# Altium PCB PLC_Relay.PcbDoc
Units mil, origin at the board's own origin, x right, y up, seen from the top; angles counter-clockwise.
Board outline 5910 x 3111 mil, 2 copper layers (Top Layer, Bottom Layer); 70 components, 87 nets, 279 pads, 30 vias.
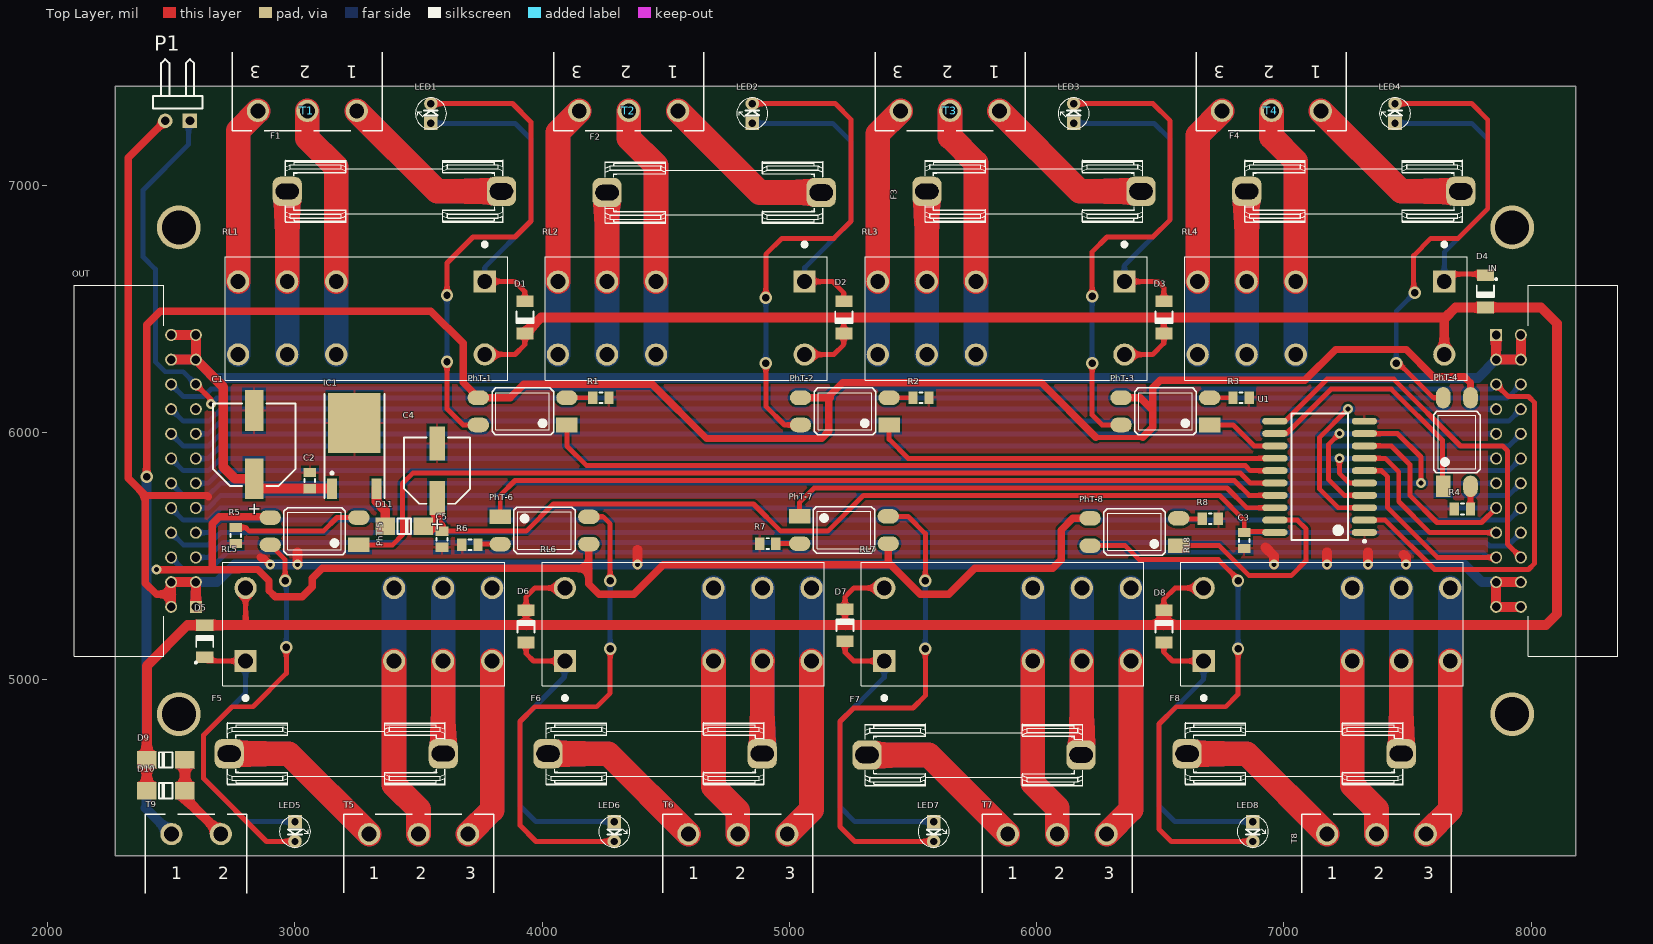
[diagram p0: Top Layer view]
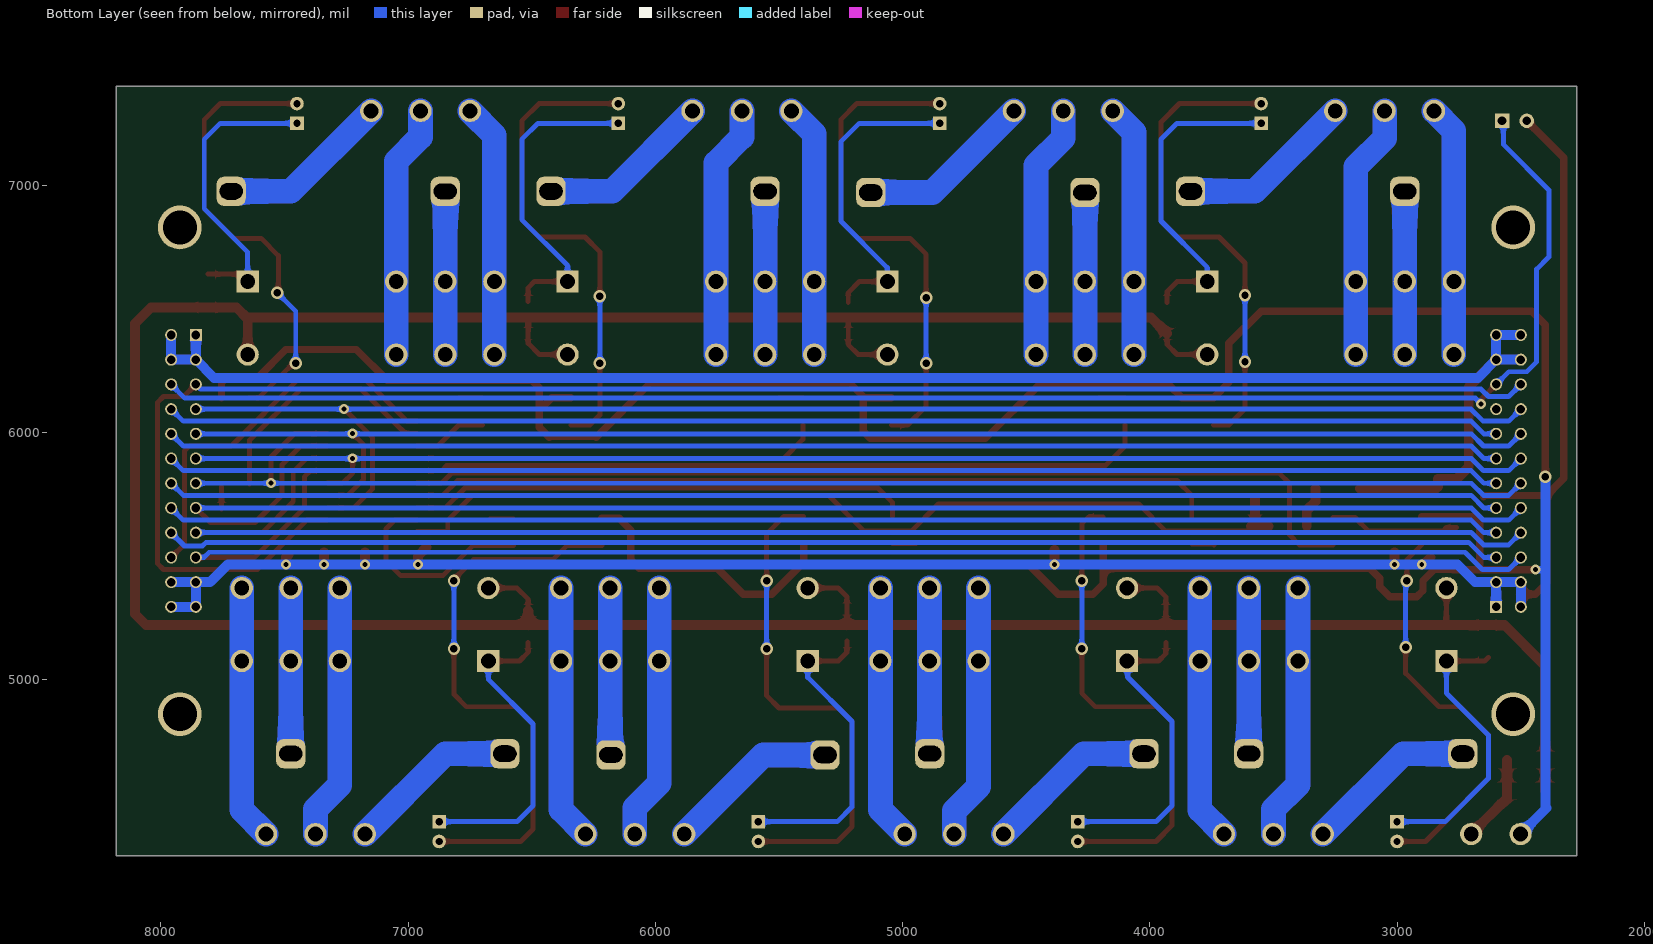
[diagram p1: Bottom Layer view, seen from below]
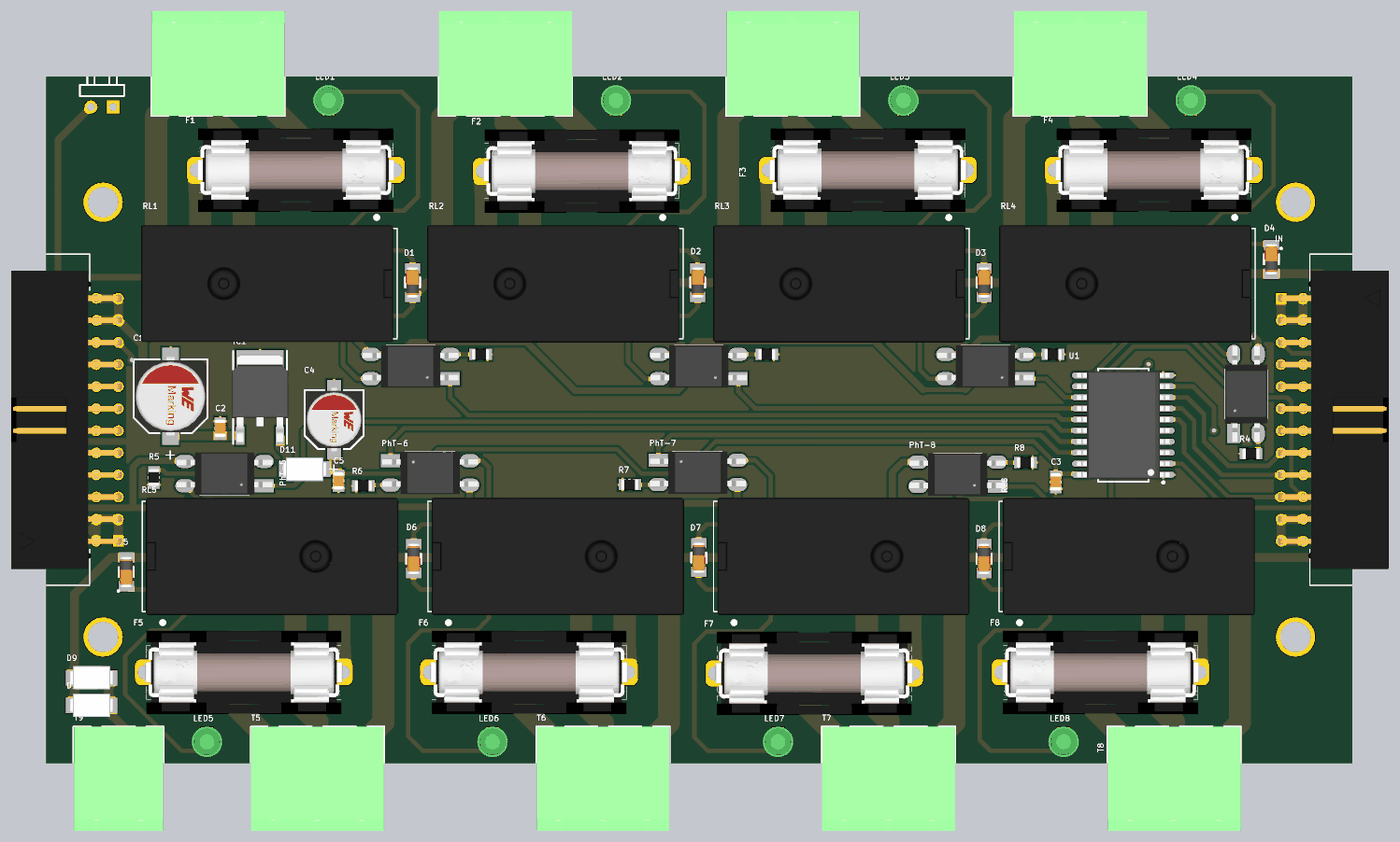
[diagram p2: 3D render of the assembled board from above, using the file's embedded part models]

## Layer stack, top to bottom
Top Solder: solder mask 0.4, Solder Resist, Dk 3.5
Top Layer: signal copper 1.4
Dielectric 1: dielectric 12.6, FR-4, Dk 4.8
Bottom Layer: signal copper 1.4
Bottom Solder: solder mask 0.4, Solder Resist, Dk 3.5

## Board outline
2272,4288 2272,7399 8182,7399 8182,4288

## Design rules (kind name [scope] priority, off if disabled: settings)
Clearance [All] p1: gap=10 ignorepadtopadclearanceinfootprint=FALSE except(0: Arc-Hole Track-Hole SMDPad-Hole THPad-Hole Via-Hole Fill-Hole Poly-Hole Region-Hole Text-Hole)
Height [All] p1: minheight=0 maxheight=2000 prefheight=500
PolygonConnect [All] p1: connectstyle=Relief reliefconductorwidth=10 reliefentries=4 polygonreliefangle="90 Angle" airgapwidth=10
RoutingVias [All] p1: holewidth=28 width=50 viastyle="Through Hole" minholewidth=20 minwidth=40 maxholewidth=28 maxwidth=50
SolderMaskExpansion [All] p1: expansion=4 istentingtop=FALSE
Width [All] p1: maxlimit=100 minlimit=10 preferedwidth=40
29 further rules are at their usual default settings.

## Components (designator, comment, footprint, x,y, rotation, side; value= is the part's Value field where it differs from the comment)
C1 "100uF,50V" WCAP-AS5H_8x10.5 2835,5950 r270 top
C2 "100nF" SMD_CAP_0805 3060,5837.09 r270 top
C3 "100nF" SMD_CAP_0805 6840,5530.04 r90 top
C4 "220uF,16V" WCAP-AS5H_6.3x7.7 3575,5845 r270 top
C5 "100nF" SMD_CAP_0805 3595,5535.04 r90 top
D1 "1N4148" LL4148 3930,6465 r270 top
D2 "1N4148" LL4148 5220,6465 r270 top
D3 "1N4148" LL4148 6515,6465 r270 top
D4 "1N4148" LL4148 7815,6570 r270 top
D5 "1N4148" LL4148 2635,5155 r90 top
D6 "1N4148" LL4148 3935,5215 r90 top
D7 "1N4148" LL4148 5225,5220 r90 top
D8 "1N4148" LL4148 6515,5215 r90 top
D9 "1n5822" "Diode 1N4007 SMD" 2555,4675 r180 top
D10 "1n5822" "Diode 1N4007 SMD" 2555,4550 r180 top
D11 "1n5822" "Diode 1N4007 SMD" 3365,5620 r0 top
F1 "F=1.0 A" Fuse_5x20 3401.93,6975 r180 top
F2 "F=1.0 A" Fuse_5x20 4695.64,6970 r180 top
F3 "F=1.0 A" Fuse_5x20 5989.36,6975 r180 top
F4 "F=1.0 A" Fuse_5x20 7283.07,6975 r180 top
F5 "F=1.0 A" Fuse_5x20 3166.93,4700 r0 top
F6 "F=1.0 A" Fuse_5x20 4456.93,4700 r0 top
F7 "F=1.0 A" Fuse_5x20 5746.93,4695 r0 top
F8 "F=1.0 A" Fuse_5x20 7041.93,4700 r0 top
IC1 "L78M05" TO-252 3240,5905 r0 top
IN "2-1761605-8" TE_2-1761605-8 7859,6394 r270 top locked
LED1 "Red" LED-3mm 3550,7290 r90 top
LED2 "Red" LED-3mm 4850,7290 r90 top
LED3 "Red" LED-3mm 6150,7290 r90 top
LED4 "Red" LED-3mm 7450,7290 r90 top
LED5 "Red" LED-3mm 3000,4385 r270 top
LED6 "Red" LED-3mm 4291.67,4385 r270 top
LED7 "Red" LED-3mm 5583.33,4385 r270 top
LED8 "Red" LED-3mm 6875,4385 r270 top
OUT "2-1761605-8" TE_2-1761605-8 2599,5294 r90 top locked
P1 "Header 2H" HDR1X2H 2575,7260 r180 top
PhT-1 "TLP521-1" PCBComponent_1 3945.39,6107.99 r180 top
PhT-2 "TLP521-1" PCBComponent_1 5248.66,6107.99 r180 top
PhT-3 "TLP521-1" PCBComponent_1 6545.4,6107.99 r180 top
PhT-4 "TLP521-1" PCBComponent_1 7723.23,5936.34 r90 top
PhT-5 "TLP521-1" PCBComponent_1 3103.66,5623.23 r180 top
PhT-6 "TLP521-1" PCBComponent_1 3985,5580 r0 top
PhT-7 "TLP521-1" PCBComponent_1 5196.34,5582.01 r0 top
PhT-8 "TLP521-1" PCBComponent_1 6420,5620 r180 top
R1 "270" "RES 0805 (2012X06L)" 4269.96,6140 r180 top
R2 "270" "RES 0805 (2012X06L)" 5564.96,6140 r180 top
R3 "270" "RES 0805 (2012X06L)" 6859.96,6140 r180 top
R4 "270" "RES 0805 (2012X06L)" 7690,5690 r0 top
R5 "270" "RES 0805 (2012X06L)" 2760,5550.04 r90 top
R6 "270" "RES 0805 (2012X06L)" 3675.04,5545 r0 top
R7 "270" "RES 0805 (2012X06L)" 4880.04,5550 r0 top
R8 "270" "RES 0805 (2012X06L)" 6734.96,5650 r180 top
RL1 "MPJ2-S-124-C" RELAY_RT424024 3767.64,6610.28 r270 top
RL2 "MPJ2-S-124-C" RELAY_RT424024 5061.5,6610 r270 top
RL3 "MPJ2-S-124-C" RELAY_RT424024 6355.35,6610 r270 top
RL4 "MPJ2-S-124-C" RELAY_RT424024 7649.21,6610 r270 top
RL5 "MPJ2-S-124-C" RELAY_RT424024 2800,5075 r90 top
RL6 "MPJ2-S-124-C" RELAY_RT424024 4091.93,5075 r90 top
RL7 "MPJ2-S-124-C" RELAY_RT424024 5383.86,5075 r90 top
RL8 "MPJ2-S-124-C" RELAY_RT424024 6675.79,5075 r90 top
T1 "PHOENIX" "MSTB 2,5/3-G-5,08" 3050,7300 r180 top
T2 "PHOENIX" "MSTB 2,5/3-G-5,08" 4350,7300 r180 top
T3 "PHOENIX" "MSTB 2,5/3-G-5,08" 5650,7300 r180 top
T4 "PHOENIX" "MSTB 2,5/3-G-5,08" 6950,7300 r180 top
T5 "PHOENIX" "MSTB 2,5/3-G-5,08" 3500,4375 r0 top
T6 "PHOENIX" "MSTB 2,5/3-G-5,08" 4791.67,4375 r0 top
T7 "PHOENIX" "MSTB 2,5/3-G-5,08" 6083.33,4375 r0 top
T8 "PHOENIX" "MSTB 2,5/3-G-5,08" 7375,4375 r0 top
T9 "PHOENIX" "MSTB 2,5/2-G-5,08" 2600,4375 r0 top
U1 "74573" SO20_M 7145,5820 r180 top

## Footprints (in the part's own frame and the unit in brackets; to place one, negate y for a bottom-side part, rotate by r counter-clockwise, add the part's x,y. Pads: shape width x height; smd on the part's side, far side on the other; paste and mask are expansions set on the pad)
"Diode 1N4007 SMD" [mm] "DO-214AC 1N4001-4007"
  rect 2x1.8 smd: 1(0,0) 2(3.92,0)
  silkscreen extent 1.27,-0.81 2.67,0.83, body extent -0.54,-1.36 4.46,1.34, height 2.16
Fuse_5x20 [mm]
  rrect50% 3x3 hole 1.6 slot 2.4 at 0 deg: 1(11,0)
  rrect50% 3x3 hole 1.7 slot 2.4 at 0 deg: 2(-11,0)
  silkscreen extent -11.19,-3.18 11.19,3.18, body extent -11.35,-4.8 11.35,4.8, height 12
HDR1X2H [mm] "Connector; Header; 2 Position; Right Angle"
  rect 1.5x1.5 hole 0.9: 1(0,0)
  round 1.5 hole 0.9: 2(2.54,0)
  silkscreen extent -1.27,-6.35 3.81,-1.27
LED-3mm [mil]
  rect 55x55 hole 30: 1(-40,0)
  round 55 hole 30: 2(40,0)
  silkscreen extent -63,-63 63,63, body extent -69,-69 69,69, height 154
LL4148 [mm] "MELF Diode, 2-Leads, Body 3.5x1.4mm, IPC Medium Density"
  rect 1.2x1.75 smd: 1(-1.65,0) 2(1.65,0)
  silkscreen extent -0.61,-0.87 0.57,0.88, body extent -1.78,-0.75 1.72,0.75, height 1.55
"MSTB 2,5/2-G-5,08" [mil] "Header, Nominal current: 12 A Rated voltage (III/2): 320 V Number of positions: 2 Pitch: 5.08 mm Color: green Contact surface: Tin Assembly: Soldering DESIGNER:ABBAS BASEREH"
  round 90 hole 60: 1(-100,0) 2(100,0)
  silkscreen extent -205,-240 205,80, body extent -199,-394 201,79, height 340
"MSTB 2,5/3-G-5,08" [mil] "Header, Nominal current: 12 A Rated voltage (III/2): 320 V Number of positions: 3 Pitch: 5.08 mm Color: green Contact surface: Tin Assembly: Soldering  DESIGNER:ABBAS BASEREH"
  round 90 hole 60: 1(-200,0) 2(0,0) 3(200,0)
  silkscreen extent -303,-238 303,80, body extent -300,-394 300,79, height 340
PCBComponent_1 [mm]
  rect 2.2x1.5 smd: 1(-3.927,1.987)
  oval 2.2x1.5 smd: 2(-3.927,-0.813) 3(5.173,-0.813) 4(5.173,1.987)
  silkscreen extent -2.55,-1.81 3.77,2.99, body extent -4.9,-1.85 6.15,3.03, height 4.6
RELAY_RT424024 [mil]
  round 90 hole 60: 11(0,-799.21) 12(0,-600.79) 14(0,-997.64) 21(295.28,-799.21) 22(295.28,-600.79) 24(295.28,-997.64) A2(295.28,0)
  rect 90x90 hole 60: A1(0,0)
  silkscreen extent -158,-1049 400,93, body extent -116,-1066 416,76, height 1004
"RES 0805 (2012X06L)" [mm] "Chip Resistor, 2-Leads, Body 2.0x1.3mm, IPC High Density _ (0.100 W)"
  rect 0.95x1.3 smd: 1(0,0) 2(1.65,0)
  silkscreen extent 0.67,-0.55 0.97,0.55, body extent -0.19,-0.63 1.84,0.64, height 0.6
SMD_CAP_0805 [mm]
  rect 0.95x1.3 smd: 1(0,0) 2(1.65,0)
  silkscreen extent 0.67,-0.55 0.97,0.55, body extent -0.19,-0.63 1.84,0.63, height 0.65
SO20_M [mm] "SOIC, 20-Leads, Body 12.8x7.5mm, Pitch 1.27mm, IPC Low Density"
  oval 2.6x0.7 smd: 1(-4.6,5.715) 2(-4.6,4.445) 3(-4.6,3.175) 4(-4.6,1.905) 5(-4.6,0.635) 6(-4.6,-0.635) 7(-4.6,-1.905) 8(-4.6,-3.175) 9(-4.6,-4.445) 10(-4.6,-5.715) 11(4.6,-5.715) 12(4.6,-4.445) 13(4.6,-3.175) 14(4.6,-1.905) 15(4.6,-0.635) 16(4.6,0.635) 17(4.6,1.905) 18(4.6,3.175) 19(4.6,4.445) 20(4.6,5.715)
  silkscreen extent -4.72,-6.5 2.9,6.74, body extent -5.32,-6.22 5.32,6.22, height 1.7
TE_2-1761605-8 [mm]
  rect 1.24x1.24 hole 0.89: 1(0,0)
  round 1.24 hole 0.89: 2(0,2.54) 3(2.54,0) 4(2.54,2.54) 5(5.08,0) 6(5.08,2.54) 7(7.62,0) 8(7.62,2.54) 9(10.16,0) 10(10.16,2.54) 11(12.7,0) 12(12.7,2.54) 13(15.24,0) 14(15.24,2.54) 15(17.78,0) 16(17.78,2.54) 17(20.32,0) 18(20.32,2.54) 19(22.86,0) 20(22.86,2.54) 21(25.4,0) 22(25.4,2.54) 23(27.94,0) 24(27.94,2.54)
  silkscreen extent -5.83,-0.1 33.02,12.51, body extent -3.17,-0.31 31.12,12.34, height 9.37
TO-252 [mm] "D-PAK/TO-252-AA; 3 Leads (1 Cropped); Body 10.1 (inc. leads) x 6.6 mm (LxW max)"
  rect 1x2.1 smd: 1(-2.285,-3.375) 3(2.285,-3.375)
  rect 5.4x6.2 smd: 4(0,3.375)
  silkscreen extent -3.08,-4.32 3.09,6.38, body extent -3.27,-4.11 3.27,5.83, height 2.39
WCAP-AS5H_6.3x7.7 [mm] "Aluminum Electrolytic Capacitors, 6.3x7.7mm"
  rect 3.5x1.6 smd: 1(-2.8,0) 2(2.8,0)
  silkscreen extent -3.4,-3.4 3.4,3.4, body extent -3.65,-3.3 3.65,3.3, height 7.7
WCAP-AS5H_8x10.5 [mm] "Aluminum Electrolytic Capacitors, 8x10.5mm"
  rect 4.2x1.9 smd: 1(-3.5,0) 2(3.5,0)
  silkscreen extent -4.25,-4.25 4.25,4.25, body extent -4.5,-4.15 4.5,4.15, height 10.5

## Part data
C1: library part 865230653012, "WCAP-AS5H SMT Aluminum Electrolytic Capacitors, D8mm x L10.5mm, 47uF, +/-20%, 50VDC", Capacitance=47uF, Capacitance Tolerance=+/-20%, Leakage Current=23.5uA, Operating Temperature="-40 to +105degC", Rated Voltage=50VDC, Ripple Current max.=95mA, ComponentLink1Description=Manufacturer, ComponentLink1URL=http://www.we-online.de, ComponentLink2Description=Datasheet, ComponentLink2URL=https://katalog.we-online.com/pbs/datasheet/865230653012.pdf, Diameter=8mm, Dissipation Factor=12%, Endurance=5000h, Length=10.5mm, Mounting Technology=SMT, Packaging="Tape and Reel", Part Number=865230653012, Published Date="August 2019", Publisher="Wurth Elektronik", Technical Reference=ASDE105470M050DVCTEE000
C2 C3 C5: library part Cap-Bipolar, "Bipolar Capacitor", Voltage=100V, Adding Date=1387/12/20, Designer="Saeid Jorablo", Organazation=ControTec
C4: library part 865230345005, "WCAP-AS5H SMT Aluminum Electrolytic Capacitors, D6.3mm x L7.7mm, 100uF, +/-20%, 16VDC", Capacitance=100uF, Capacitance Tolerance=+/-20%, Leakage Current=16uA, Operating Temperature="-40 to +105degC", Rated Voltage=16VDC, Ripple Current max.=81mA, ComponentLink1Description=Manufacturer, ComponentLink1URL=http://www.we-online.de, ComponentLink2Description=Datasheet, ComponentLink2URL=https://katalog.we-online.com/pbs/datasheet/865230345005.pdf, Diameter=6.3mm, Dissipation Factor=22%, Endurance=5000h, Length=7.7mm, Mounting Technology=SMT, Packaging="Tape and Reel", Part Number=865230345005, Published Date="August 2019", Publisher="Wurth Elektronik", Technical Reference=ASDD077101M016DVCTCE000
D1 D2 D3 D4 D5 D6 D7 D8: library part "Diode 1N4148", "High Conductance Fast Diode", Code_JEDEC=DO-204-AH, ComponentLink1Description="Manufacturer Link", ComponentLink1URL=http://www.fairchildsemi.com/, ComponentLink2Description=Datasheet, ComponentLink2URL=http://www.fairchildsemi.com/ds/1N%2F1N4148.pdf, DatasheetVersion=1997, LatestRevisionDate=17-Jul-2002, LatestRevisionNote="Re-released for DXP Platform.", PackageDescription="Diode, Axial; Body 3.8 x 1.9 mm (LxDia. max), Lead Dia. 0.53 mm (max)", PackageReference=DO-35, Published=8-Jun-2000, Publisher="Altium Limited"
D9 D10 D11: library part "1N5822 SMD", "Schottky Rectifiers", Manufacturer="ON Semiconductor/Fairchild", Data=16-12-2016, Designer="Abbas Basereh", Link=https://www.aliexpress.com/item/Free-shipping-100pcs-1n5822-sma-smd-do-214ac-Schottky-diode-ss34/32337482329.html?spm=2114.01010208.3.1.zLZDsP&ws_ab_test=searchweb0_0,searchweb201602_4_10065_10068_10084_10083_10080_10082_10081_10060_10061_10062_10056_10055_10054_10059_10099_10078_10079_427_10073_10103_10102_10096_10052_10050_10051,searchweb201603_4&btsid=6e50dc92-ac69-45bc-a19e-209af19ce602, Part. No=SS34
F1 F2 F3 F4 F5 F6 F7 F8: library part "Fuse 5x20 with holdeer pins", "Fuses 5x20", Data=28-12-2016, Desc.="fuse with holder pins 5x20", Designer="Abbas Basereh"
IC1: "Precision 500mA Regulator"
IN OUT: "IDC LOW PRO HDR 64P RA BLUE", Package=None, Availability=Unavailable, MP=2-1761605-8, Price=None
LED1 LED2 LED3 LED4 LED5 LED6 LED7 LED8: library part LED, "LED", Adding Date=1387/12/22, Color=Red, Designer="Saeid Jorablo", Organazation=ControTec, Size=3mm
P1: "Header, 2-Pin, Right Angle", LatestRevisionDate=17-Jul-2002, LatestRevisionNote="Re-released for DXP Platform.", Publisher="Altium Limited"
R1 R2 R3 R4 R5 R6 R7 R8: library part Resistor, "Resistor", Power="1/8 W", Tolerance=5%
RL1 RL2 RL3 RL4 RL5 RL6 RL7 RL8: library part RT424024, "General Purpose Relay DPDT _2 Form C_ 24VDC Coil Through Hole", Package=None, Availability=Unavailable, MF="TE Connectivity", MP=RT424024, Price=None, SnapEDA_Link=https://www.snapeda.com/parts/RT424024/TE%20Connectivity%20Potter%20%26%20Brumfield%20Relays/view-part/2754819/?ref=snap, TE_purchase_URL=https://www.te.com/usa-en/product-6-1393243-8.html?te_bu=Cor&te_type=disp&te_campaign=seda_glo_cor-seda-global-disp-prtnr-fy19-seda-model-bom-cta_sma-317_1&elqCampaignId=32493
T1 T2 T3 T4 T5 T6 T7 T8: library part CON_Phoenix_MSTB_03, "3 Pitch: 5.08 mm Color: green Contact surface: Tin Assembly", Manufacturer="PHOENIX CONTACT", Max Current="12 A", Voltage="320 V", Category=Connector, ComponentLink1Description="Header, Nominal current: 12 A Rated voltage (III/2): 320 V Number of positions: 3 Pitch: 5.08 mm Color: green Contact surface: Tin Assembly: Soldering  DESIGNER:ABBAS BASEREH", ComponentLink2Description=Reference, Connector type="PCB Terminal Block", Designer="ABBAS BASEREH", Mounting Technology=Through-Hole, PART.NO=PHOENIX, Pin Count=3, Positions=3, Revision 1=2017-3-1, Status=Unreleased
T9: library part CON_Phoenix_MSTB_02, "2 Pitch: 5.08 mm Color: green Contact surface: Tin Assembly", Manufacturer="PHOENIX CONTACT", Max Current="12 A", Voltage="320 V", Category=Connector, ComponentLink1Description="Header, Nominal current: 12 A Rated voltage (III/2): 320 V Number of positions: 2 Pitch: 5.08 mm Color: green Contact surface: Tin Assembly: Soldering  DESIGNER:ABBAS BASEREH", ComponentLink2Description=Reference, Connector type="PCB Terminal Block", Designer="ABBAS BASEREH", Mounting Technology=Through-Hole, PART.NO=PHOENIX, Pin Count=2, Positions=2, Revision 1=2017-3-1, Status=Unreleased
U1: "OCTAL D-TYPE TRANSPARENT LCH"

## Free pads (board coordinates)
  round 177.17 hole 137.8: 3(2530,6829) 4(2530,4860) 5(7924,4860) 6(7924,6829)

## Via types
v1: diameter 50, hole 30, Top Layer to Bottom Layer, tented both sides, 17 vias
v2: diameter 40, hole 20, Top Layer to Bottom Layer, tented both sides, 13 vias

## Nets (pads, with @x,y where several pads share a name; then routed paths per layer and width w, separated by ;. In a path a pad name is that pad's centre, name@x,y a point inside that pad or via, vN(x,y) a via of type N, cw(c..) or ccw(c..) an arc to the next point about the centre after c; other vN are vias at no path point)
24V: C1.2 C2.2 IC1.1 IN.1 IN.2 IN.3 IN.4 OUT.21 OUT.22 OUT.23 OUT.24 | length 7496.6
  Top Layer w40: OUT.22 OUT.21 ; OUT.24 OUT.23 OUT.21 ; IC1.1 C2.2 2842.87,5772.13 2835,5780 C1.2 2757.8,5812.2 2710,5860 2710,6183 OUT.21 ; IN.1 IN.3 IN.4 IN.2
  Bottom Layer w40: OUT.22 OUT.21 ; OUT.24 OUT.23 OUT.21 ; IN.1 IN.3 ; IN.2 IN.4 IN.3 ; OUT.21 2673,6220 7785,6220 IN.3
DGND: C1.1 C2.1 C3.1 C4.1 C5.1 IC1.4 IN.21 IN.22 IN.23 IN.24 OUT.1 OUT.2 OUT.3 OUT.4 P1.2 R1.1 R2.1 R3.1 R4.1 R5.1 R6.1 R7.1 R8.1 U1.1 U1.10 | length 9497
  Top Layer w30: P1.2 2325,7110 2325,5815 2395,5745 ; 2499,5345 2440,5345 2395,5390 2395,5745 ; 2650,5740 2645.41,5744.59 2395.41,5744.59 2395,5745 ; 2859.11,5495 2863.63,5490.47 2874.53,5490.47 v2(2900,5465)
  Top Layer w40: OUT.2 2499,5345 OUT.4 2500,5395 OUT.3@2599,5395 ; OUT.1 OUT.3 ; v2(3010,5465) 3010,5515 ; v2(4385,5465) 4385,5525 ; 6925,5535 6960,5500 v2(6960,5465) ; v2(7175,5465) 7175,5515 ; v2(7340,5465) 7340,5515 ; 7485,5505 7495,5495 v2(7495,5465) ; IN.24 IN.23 IN.21 IN.22
  Bottom Layer w40: OUT.2 OUT.4 OUT.3 ; OUT.1 OUT.3 ; 6990,5465 v2(6960,5465) ; v2(7175,5465) v2(6960,5465) ; IN.24 IN.23 IN.21 ; IN.22 IN.21 ; OUT.3 2684,5394 2755,5465 v2(2900,5465) v2(3010,5465) v2(4385,5465) v2(6960,5465) ; v2(6960,5465) v2(7340,5465) v2(7495,5465) 7730,5465 7801,5394 IN.21
DIO-A0: IN.20 U1.11 | length 1585
  Top Layer w20: U1.11 7005,6045 7175,6215 7445,6215 7715,5945 7885,5945 7905,5925 7905,5548 IN.20
DIO-A1: IN.18 OUT.5 | length 5413.8
  Bottom Layer w20: OUT.5 2649,5494 2710,5555 7817.43,5555 7832.43,5540 7905,5540 IN.18
DIO-A2: IN.16 OUT.7 | length 5401.4
  Bottom Layer w20: OUT.7 2649,5594 2700,5645 7910,5645 IN.16
DIO-A3: IN.14 OUT.9 | length 5401.4
  Bottom Layer w20: OUT.9 2649,5694 2700,5745 7910,5745 IN.14
DIO-A4: IN.12 OUT.11 | length 5401.4
  Bottom Layer w20: OUT.11 2649,5794 2700,5845 7910,5845 IN.12
DIO-A5: IN.10 OUT.13 | length 5401.4
  Bottom Layer w20: OUT.13 2649,5894 2700,5945 7910,5945 IN.10
DIO-A6: IN.8 OUT.15 | length 5401.4
  Bottom Layer w20: OUT.15 2649,5994 2700,6045 7910,6045 IN.8
DIO-A7: IN.6 OUT.19 P1.1 | length 6712.1
  Top Layer w20: OUT.19 2660,6133 v2(2660,6115)
  Bottom Layer w20: P1.1 2570,7255 2570,7165 2385,6980 2385,6710 2435,6660 2435,6285 2475,6245 2548,6245 OUT.19 ; v2(2660,6115) 2683.41,6138.41 7903.41,6138.41 IN.6
DIO-D0: IN.19 OUT.6 U1.6 | length 6169.5
  Top Layer w20: U1.6 7395,5845 7420,5820 7420,5695 7621,5494 IN.19
  Bottom Layer w20: OUT.6 2548,5445 2655,5445 2725,5515 7805,5515 7826,5494 IN.19
DIO-D1: IN.17 OUT.8 U1.7 | length 6129.3
  Top Layer w20: U1.7 7410,5895 7465,5840 7465,5720 7591,5594 IN.17
  Bottom Layer w20: OUT.8 2548,5545 2650,5545 2700,5595 7858,5595 IN.17
DIO-D2: IN.15 OUT.10 U1.8 | length 6159.6
  Top Layer w20: U1.8 7435,5945 7510,5870 7510,5745 7620,5635 7800,5635 IN.15
  Bottom Layer w20: OUT.10 2548,5645 2650,5645 2699,5694 IN.15
DIO-D3: IN.13 OUT.12 U1.9 | length 5773.8
  Top Layer w20: U1.9 7460,5995 7555,5900 v2(7555,5795)
  Bottom Layer w20: OUT.12 2548,5745 2650,5745 2699,5794 IN.13
DIO-D4: IN.11 OUT.14 U1.5 | length 5578.3
  Top Layer w20: v2(7225,5895) 7225,5835 7265,5795 U1.5
  Bottom Layer w20: OUT.14 2548,5845 2650,5845 2699,5894 IN.11
DIO-D5: IN.9 OUT.16 U1.4 | length 5777.3
  Top Layer w20: v2(7225,5995) 7180,5950 7180,5810 7245,5745 U1.4
  Bottom Layer w20: OUT.16 2548,5945 2650,5945 2699,5994 IN.9
DIO-D6: IN.7 OUT.18 U1.3 | length 5985.4
  Top Layer w20: v2(7260,6095) 7145,5980 7145,5770 7220,5695 U1.3
  Bottom Layer w20: OUT.18 2548,6045 2651.57,6045 2700.57,6094 IN.7
DIO-D7: IN.5 OUT.20 U1.2 | length 7019.3
  Top Layer w20: U1.2 7410,5645 7610,5445 7990,5445 8015,5470 8015,6120 7990,6145 7908,6145 IN.5
  Bottom Layer w20: OUT.20 2548,6145 2630,6145 2660,6175 7840,6175 IN.5
GND: PhT-1.3 PhT-2.3 PhT-3.3 PhT-4.3 PhT-5.3 PhT-6.3 PhT-7.3 PhT-8.3 T9.1 | length 13781.3
  Top Layer w20: 6240,5980 6430,5980
  Top Layer w30: v1(2400,5820) 2400,6435 2455,6490 3550,6490 3680,6360 3680,6201.73 PhT-1.3 3870,6140 3925,6195 4445,6195 4664.76,5975.24 5130.24,5975.24 5160,6005 5160,6145 5215,6200 6020,6200 6240,5980 ; v2(2440,5444.59) 2670,5444.59 ; PhT-5.3 2900,5658.7 2693.7,5658.7 2665,5630 2665,5449.59 2670,5444.59 ; PhT-2.3 5165,6140 ; PhT-7.3 5400,5475 5410,5465 ; PhT-8.3 6147.01,5652.01 6100,5605 6100,5485 6065,5450 5750,5450 5645,5345 5530,5345 5410,5465 ; PhT-3.3 6420,6140 6470,6090 ; 6430,5980 6470,6020 6470,6180 6500,6210 7085,6210 7210,6335 7495,6335 7605,6225 7730,6225 7755.24,6199.76 PhT-4.3 ; 2670,5444.59 2774.59,5444.59 2775,5445 2850,5445 2895,5400 2895,5360 2920,5335 3030,5335 3070,5375 3070,5410 3110,5450 4188.66,5450 PhT-6.3 4188.66,5386.34 4230,5345 4370,5345 4490,5465 5410,5465
  Bottom Layer w30: 2400,5445 2400.41,5444.59 v2(2440,5444.59)
  Bottom Layer w40: v1(2400,5820) 2400,5445 2400,4485 2395,4480 T9.1
NetD1_1: D1.1 LED1.1 RL1.A1 | length 1308.3
  Top Layer w20: RL1.A1 3889.72,6610.28 3930,6570 D1.1@3930,6524.96
  Bottom Layer w20: LED1.1 3890,7250 3955,7185 3955,6855 3767.64,6667.64 RL1.A1
NetD2_1: D2.1 LED2.1 RL2.A1 | length 1291.3
  Top Layer w20: RL2.A1 5175,6610 5220,6565 D2.1@5220,6524.96
  Bottom Layer w20: LED2.1 5175,7250 5250,7175 5250,6855 5061.5,6666.5 RL2.A1
NetD3_1: D3.1 LED3.1 RL3.A1 | length 1293.4
  Top Layer w20: RL3.A1 6490,6610 6515,6585 D3.1
  Bottom Layer w20: LED3.1 6475,7250 6540,7185 6540,6860 6355.35,6675.35 RL3.A1
NetD4_1: D4.1 LED4.1 RL4.A1 | length 1223
  Top Layer w20: RL4.A1 7679.21,6640 D4.1@7810.04,6640
  Bottom Layer w20: LED4.1 7760,7250 7825,7185 7825,6905 7649.21,6729.21 RL4.A1
NetD5_1: D5.1 LED5.1 RL5.A1 | length 1164.1
  Top Layer w20: D5.1@2630,5090.04 2645.04,5075 RL5.A1
  Bottom Layer w20: RL5.A1 2800,4945 2630,4775 2630,4600 2805,4425 LED5.1
NetD6_1: D6.1 LED6.1 RL6.A1 | length 1283.3
  Top Layer w20: D6.1 3935,5105 3965,5075 RL6.A1
  Bottom Layer w20: RL6.A1 4090,5073.07 4090,5010 3910,4830 3910,4490 3975,4425 LED6.1
NetD7_1: D7.1 LED7.1 RL7.A1 | length 1285.7
  Top Layer w20: D7.1 5225,5110 5260,5075 RL7.A1
  Bottom Layer w20: RL7.A1 5383.86,5008.86 5205,4830 5205,4485 5265,4425 LED7.1
NetD8_1: D8.1 LED8.1 RL8.A1 | length 1282.1
  Top Layer w20: D8.1 6515,5110 6550,5075 RL8.A1
  Bottom Layer w20: RL8.A1 6675.79,5000.79 6495,4820 6495,4490 6560,4425 LED8.1
NetD9_1: D9.1 D10.1 T9.2 | length 360.1
  Top Layer w40: D9.1 D10.1 2555,4520 T9.2
NetD11_1: D11.1 IC1.3 | length 166.6
  Top Layer w40: IC1.3 3329.96,5720.04 3365,5685 D11.1
NetF1_2: F1.2 T1.1 | length 1439.2
  Top Layer w100: T1.1 3575,6975 F1.2
  Bottom Layer w100: T1.1 3575,6975 F1.2
NetF2_2: F2.2 T2.1 | length 1430.8
  Top Layer w100: T2.1 4880,6970 F2.2
  Bottom Layer w100: T2.1 4880,6970 F2.2
NetF3_2: F3.2 T3.1 | length 1414.1
  Top Layer w100: T3.1 6175,6975 F3.2
  Bottom Layer w100: T3.1 6175,6975 F3.2
NetF4_2: F4.2 T4.1 | length 1401.5
  Top Layer w100: T4.1 7475,6975 F4.2
  Bottom Layer w100: T4.1 7475,6975 F4.2
NetF5_2: F5.2 T5.1 | length 1401.5
  Top Layer w100: F5.2 2975,4700 T5.1
  Bottom Layer w100: F5.2 2975,4700 T5.1
NetF6_2: F6.2 T6.1 | length 1404.9
  Top Layer w100: F6.2 4266.67,4700 T6.1
  Bottom Layer w100: F6.2 4266.67,4700 T6.1
NetF7_2: F7.2 T7.1 | length 1404
  Top Layer w100: F7.2 5563.33,4695 T7.1
  Bottom Layer w100: F7.2 5563.33,4695 T7.1
NetF8_2: F8.2 T8.1 | length 1401.5
  Top Layer w100: F8.2 6850,4700 T8.1
  Bottom Layer w100: F8.2 6850,4700 T8.1
NetLED1_2: LED1.2 PhT-1.4 | length 1990.2
  Top Layer w20: LED1.2 3880,7330 3955,7255 3955,6855 3890,6790 3720,6790 3615,6685 v1(3615,6555) ; v1(3615,6285) 3615,6095 3680.24,6029.76 PhT-1.4
  Bottom Layer w20: v1(3615,6285) v1(3615,6555)
NetLED2_2: LED2.2 PhT-2.4 | length 2024
  Top Layer w20: LED2.2 5185,7330 5250,7265 5250,6855 5180,6785 4970,6785 4905,6720 v1(4905,6545) ; v1(4905,6280) 4905,6105 4980.24,6029.76 PhT-2.4
  Bottom Layer w20: v1(4905,6280) v1(4905,6545)
NetLED3_2: LED3.2 PhT-3.4 | length 1981.2
  Top Layer w20: LED3.2 6470,7330 6540,7260 6540,6860 6470,6790 6285,6790 6225,6730 v1(6225,6550) ; v1(6225,6280) 6225,6070 6265.24,6029.76 PhT-3.4
  Bottom Layer w20: v1(6225,6280) v1(6225,6550)
NetLED4_2: LED4.2 PhT-4.4 | length 1854.7
  Top Layer w20: LED4.2 7760,7330 7825,7265 7825,6905 7705,6785 7595,6785 7525,6715 v1@7525,6565 ; v1(7455,6280) 7465,6280 7605,6140 PhT-4.4
  Bottom Layer w20: v1(7455,6280) 7455,6490 v1(7530,6565)
NetLED5_2: LED5.2 PhT-5.4 | length 1636.1
  Top Layer w20: PhT-5.4 2960,5485 v1(2960,5400) ; v1(2965,5130) 2965,5025 2830,4890 2745,4890 2630,4775 2630,4600 2885,4345 LED5.2
  Bottom Layer w20: v1(2960,5400) 2965,5395 v1(2965,5130)
NetLED6_2: LED6.2 PhT-6.4 | length 2024.3
  Top Layer w20: PhT-6.4 4246.77,5658.23 4275,5630 v1(4275,5400) ; v1(4275,5125) 4275,4945 4220,4890 3970,4890 3910,4830 3910,4410 3975,4345 LED6.2
  Bottom Layer w20: v1(4275,5125) v1(4275,5400)
NetLED7_2: LED7.2 PhT-7.4 | length 2050.8
  Top Layer w20: PhT-7.4 5479.76,5660.24 5550,5590 v1(5550,5400) ; v1(5550,5125) 5550,4935 5500,4885 5260,4885 5205,4830 5205,4405 5265,4345 LED7.2
  Bottom Layer w20: v1(5550,5125) v1(5550,5400)
NetLED8_2: LED8.2 PhT-8.4 | length 2319.9
  Top Layer w20: PhT-8.4 6358.23,5541.77 6415,5485 6735,5485 6815,5405 v1(6815,5400) ; v1(6815,5125) 6815,4940 6765,4890 6565,4890 6495,4820 6495,4395 6545,4345 LED8.2
  Bottom Layer w20: v1(6815,5125) 6820,5130 6815,5135 v1(6815,5400)
NetPhT-1_2: PhT-1.2 R1.2 | length 105
  Top Layer w20: PhT-1.2 R1.2
NetPhT-2_2: PhT-2.2 R2.2 | length 96.7
  Top Layer w20: PhT-2.2 R2.2
NetPhT-3_2: PhT-3.2 R3.2 | length 95
  Top Layer w20: PhT-3.2 R3.2
NetPhT-4_2: PhT-4.2 R4.2 | length 91.8
  Top Layer w20: R4.2 7755.24,5690.28 PhT-4.2
NetPhT-5_2: PhT-5.2 R5.2 | length 527.4
  Top Layer w20: R5.2 2800,5615 2815,5600 3114.53,5600 3169.76,5655.24 PhT-5.2
NetPhT-6_2: PhT-6.2 R6.2 | length 91.6
  Top Layer w20: R6.2 3742.99,5547.99 PhT-6.2
NetPhT-7_2: PhT-7.2 R7.2 | length 96.7
  Top Layer w20: R7.2 PhT-7.2
NetPhT-8_2: PhT-8.2 R8.2 | length 95.4
  Top Layer w20: PhT-8.2@6574.6,5650 R8.2
RL1: PhT-1.1 U1.15 | length 2990.1
  Top Layer w20: PhT-1.1 4100,5945 4180,5865 6845,5865 6865,5845 U1.15
RL1-CM: F1.1 RL1.11 RL1.21 | length 1025.1
  Top Layer w100: RL1.11 2968.86,6610.71 F1.1
  Bottom Layer w100: RL1.21 RL1.11 2968.43,6974.57 F1.1
RL1-NC: RL1.12 RL1.22 T1.2 | length 1771.5
  Top Layer w100: T1.2 3050,7190 3166.85,7073.15 RL1.12
  Bottom Layer w100: T1.2 3050,7190 3166.85,7073.15 RL1.12 RL1.22
RL1-NO: RL1.14 RL1.24 T1.3 | length 1741
  Top Layer w100: RL1.14 2770,7220 T1.3
  Bottom Layer w100: RL1.24 RL1.14 2770,7220 T1.3
RL2: PhT-2.1 U1.14 | length 1650.4
  Top Layer w20: PhT-2.1 5403.27,5971.73 5480,5895 U1.14
RL2-CM: F2.1 RL2.11 RL2.21 | length 1015.5
  Top Layer w100: RL2.11 4262.28,6969.71 F2.1
  Bottom Layer w100: RL2.21 4262.57,6315.01 F2.1
RL2-NC: RL2.12 RL2.22 T2.2 | length 1767
  Top Layer w100: T2.2 4350,7190 4460.71,7079.29 RL2.12
  Bottom Layer w100: T2.2 4350,7190 4460.71,7079.29 RL2.12 RL2.22
RL2-NO: RL2.14 RL2.24 T2.3 | length 1746.6
  Top Layer w100: RL2.14 4063.86,7213.86 T2.3
  Bottom Layer w100: RL2.24 RL2.14 4063.86,7213.86 T2.3
RL3: PhT-3.1 U1.13 | length 299
  Top Layer w20: PhT-3.1 6795.24,6029.76 6880,5945 U1.13
RL3-CM: F3.1 RL3.11 RL3.21 | length 1025.4
  Top Layer w100: RL3.11 5556.14,6974.86 F3.1
  Bottom Layer w100: RL3.21 RL3.11 5556.14,6974.86 F3.1
RL3-NC: RL3.12 RL3.22 T3.2 | length 1761.9
  Top Layer w100: T3.2 5650,7195 5754.57,7090.43 RL3.12
  Bottom Layer w100: T3.2 5650,7195 5754.57,7090.43 RL3.12 RL3.22
RL3-NO: RL3.14 RL3.24 T3.3 | length 1751.7
  Top Layer w100: RL3.14 5357.72,7207.72 T3.3
  Bottom Layer w100: RL3.24 RL3.14 5357.72,7207.72 T3.3
RL4: PhT-4.1 U1.12 | length 1015.9
  Top Layer w20: U1.12 7011.16,5995 7191.16,6175 7435,6175 7641.77,5968.23 PhT-4.1@7641.77,5790.4
RL4-CM: F4.1 RL4.11 RL4.21 | length 1025.3
  Top Layer w100: RL4.11 F4.1
  Bottom Layer w100: RL4.21 RL4.11 F4.1
RL4-NC: RL4.12 RL4.22 T4.2 | length 1756.8
  Top Layer w100: T4.2 6950,7195 7048.43,7096.57 RL4.12
  Bottom Layer w100: T4.2 6950,7195 7048.43,7096.57 RL4.12 RL4.22
RL4-NO: RL4.14 RL4.24 T4.3 | length 1756.8
  Top Layer w100: RL4.14 6651.57,7201.57 T4.3
  Bottom Layer w100: RL4.24 RL4.14 6651.57,7201.57 T4.3
RL5: PhT-5.1 U1.16 | length 3964.6
  Top Layer w20: PhT-5.1 3395,5545 3435,5585 3435,5793.68 3476.32,5835 6825,5835 6865,5795 U1.16
RL5-CM: F5.1 RL5.11 RL5.21 | length 1045.9
  Top Layer w100: RL5.11 3599.21,4700.79 F5.1
  Bottom Layer w100: RL5.21 RL5.11 3599.21,4700.79 F5.1
RL5-NC: RL5.12 RL5.22 T5.2 | length 1777.5
  Top Layer w100: RL5.12 3400.79,4574.21 3500,4475 T5.2
  Bottom Layer w100: RL5.22 RL5.12 3400.79,4574.21 3500,4475 T5.2
RL5-NO: RL5.14 RL5.24 T5.3 | length 1776.2
  Top Layer w100: T5.3 3797.64,4472.64 RL5.14
  Bottom Layer w100: T5.3 3797.64,4472.64 RL5.14 RL5.24
RL6: PhT-6.1 U1.17 | length 3275.2
  Top Layer w20: PhT-6.1@3830.39,5653.23 3830.39,5745.4 3890,5805 6800,5805 6860,5745 U1.17
RL6-CM: F6.1 RL6.11 RL6.21 | length 1046.2
  Top Layer w100: F6.1 4890,5073.86 RL6.11
  Bottom Layer w100: F6.1 4891.14,4701.14 RL6.11 RL6.21
RL6-NC: RL6.12 RL6.22 T6.2 | length 1777.2
  Top Layer w100: RL6.12 4692.72,4567.28 4791.67,4468.33 T6.2
  Bottom Layer w100: RL6.22 RL6.12 4692.72,4567.28 4791.67,4468.33 T6.2
RL6-NO: RL6.14 RL6.24 T6.3 | length 1776.4
  Top Layer w100: T6.3 5089.57,4472.9 RL6.14
  Bottom Layer w100: T6.3 5089.57,4472.9 RL6.14 RL6.24
RL7: PhT-7.1 U1.18 | length 2035.9
  Top Layer w20: PhT-7.1 5041.73,5716.73 5100,5775 6770,5775 6850,5695 U1.18
RL7-CM: F7.1 RL7.11 RL7.21 | length 1057.8
  Top Layer w100: F7.1 6183.07,4698.07 RL7.11
  Bottom Layer w100: F7.1 6183.07,4698.07 RL7.11 RL7.21
RL7-NC: RL7.12 RL7.22 T7.2 | length 1777
  Top Layer w100: RL7.12 5984.65,4580.35 6083.33,4481.67 T7.2
  Bottom Layer w100: RL7.22 RL7.12 5984.65,4580.35 6083.33,4481.67 T7.2
RL7-NO: RL7.14 RL7.24 T7.3 | length 1776.6
  Top Layer w100: T7.3 6381.5,4473.16 RL7.14
  Bottom Layer w100: T7.3 6381.5,4473.16 RL7.14 RL7.24
RL8: PhT-8.1 U1.19 | length 861.3
  Top Layer w20: PhT-8.1 6738.23,5541.77 6860,5420 7030,5420 7090,5480 7090,5610 7055,5645 U1.19
RL8-CM: F8.1 RL8.11 RL8.21 | length 1045.3
  Top Layer w100: F8.1 RL8.11
  Bottom Layer w100: F8.1 RL8.11 RL8.21
RL8-NC: RL8.12 RL8.22 T8.2 | length 1776.8
  Top Layer w100: RL8.12 7276.57,4573.43 7375,4475 T8.2
  Bottom Layer w100: RL8.22 RL8.12 7276.57,4573.43 7375,4475 T8.2
RL8-NO: RL8.14 RL8.24 T8.3 | length 1776.8
  Top Layer w100: T8.3 7673.43,4473.43 RL8.14
  Bottom Layer w100: T8.3 7673.43,4473.43 RL8.14 RL8.24
V+: D1.2 D2.2 D3.2 D4.2 D5.2 D6.2 D7.2 D8.2 D9.2 D10.2 RL1.A2 RL2.A2 RL3.A2 RL4.A2 RL5.A2 RL6.A2 RL7.A2 RL8.A2 | length 13778.5
  Top Layer w20: 2800,5220 RL5.A2 ; RL1.A2 3890,6315 3930,6355 D1.2@3930,6395.04 ; D6.2 3935,5220 3935,5335 3970.28,5370.28 RL6.A2 ; RL2.A2 5179.72,6314.72 5220,6355 D2.2@5220,6395.04 ; D2.2 5220,6460.04 5225,6465.04 ; 5225,5220 D7.2 5225,5335 5260.28,5370.28 RL7.A2 ; RL3.A2 6469.72,6314.72 6515,6360 6515,6465.04 ; 6515,5220 6515,5325 6560.28,5370.28 RL8.A2
  Top Layer w40: D10.2 D9.2 2400.67,5055.67 2565,5220 3935,5220 5225,5220 6515,5220 ; D1.2 3995,6465.04 5225,6465.04 6515,6465.04 ; D8.2 6515,5220 ; 6515,6465 7649.21,6465 ; RL4.A2 7649.21,6459.21 7695,6505 8040,6505 8105,6440 8105,5265 8060,5220 6515,5220
VCC: C3.2 C4.2 C5.2 D11.2 U1.20 | length 3808.6
  Top Layer w20: C5.2 3935,5600 4045,5710 4855,5710 4965,5600 5155,5600 5300,5745 6740,5745 6840,5645 C3.2@6840,5599.53 ; C3.2 C3.2@6840,5599.53 ; U1.20 6963.9,5599.53 C3.2@6840,5599.53
  Top Layer w40: D11.2 3590.67,5620 3575,5635.67 C4.2
pads on no net: OUT.17

## Polygon pours and split planes (outlines as drawn)
DGND on Top Layer "Top Layer-GND" (solid, pour order 2): 7825,6195 2635,6195 2635,5490 7825,5490

## Silkscreen, mask and mechanical layers (free items; w line width, h text height)
Bottom Solder:
  lines w50: 2733.86,4700 2975,4700 3300,4375 ; 2770,6315 2770,7220 2850,7300 ; 2968.43,6315 2968.43,6974.57 2968.86,6975 ; 3050,7300 3050,7190 3166.85,7073.15 3166.85,6315 ; 3250,7300 3575,6975 3835,6975 ; 3400.79,5370.28 3400.79,4574.21 3500,4475 3500,4375 ; 3599.21,5370.28 3599.21,4700.79 3600,4700 ; 3700,4375 3797.64,4472.64 3797.64,5370.28 ; 4023.86,4700 4266.67,4700 4591.67,4375 ; 4063.86,6314.72 4063.86,7213.86 4150,7300 ; 4262.28,6314.72 4262.28,6969.71 4262.57,6970 ; 4350,7300 4350,7185 4460.71,7074.29 4460.71,6314.72 ; 4550,7300 4880,6970 5128.71,6970 ; 4692.72,5370.28 4692.72,4567.28 4791.67,4468.33 4791.67,4375 ; 4890,4700 4891.14,4701.14 4891.14,5370.28 ; 4991.67,4375 5089.57,4472.9 5089.57,5370.28 ; 5313.86,4695 5563.33,4695 5883.33,4375 ; 5355,6325 5355,7205 5450,7300 ; 5556.14,6314.72 5556.14,6974.86 ; 5650,7300 5650,7195 5754.57,7090.43 5754.57,6314.72 ; 5850,7300 6175,6975 6422.43,6975 ; 5984.65,5370.28 5985,5369.92 5985,4580 6083.33,4481.67 6083.33,4375 ; 6180,4695 6183.07,4698.07 6183.07,5370.28 ; 6180,5071.93 6183.07,5075 ; 6283.33,4375 6381.5,4473.16 6381.5,5370.28 ; 6608.86,4700 6850,4700 7175,4375 ; 6651.57,6314.72 6651.57,7201.57 6750,7300 ; 6850,6314.72 6850,6975 ; 6950,7300 6950,7195 7048.43,7096.57 7048.43,6314.72 ; 7150,7300 7475,6975 7716.14,6975 ; 7276.57,5370.28 7276.57,4573.43 7375,4475 7375,4375 ; 7475,4700 7475,5370.28 ; 7575,4375 7673.43,4473.43 7673.43,5370.28 ; 6850,6975 6850,6975
Mechanical 1:
  lines w20: 2272,4288 8182,4288 ; 2272,4288 2272,7399 ; 2272,4288 2272,7399 ; 2272,4288 8182,4288 ; 2272,7399 8182,7399 8182,4288

## Text inside footprints (layer, text, board x,y; h text height)
C1: Top Overlay "+" at 2815.32,5717.72 h48 r270
C4: Top Overlay "+" at 3555.32,5654.06 h48 r270
T1: Top Overlay "1" at 3251.26,7482.48 h50 r180; Top Overlay "2" at 3061.26,7482.48 h50 r180; Top Overlay "3" at 2861.26,7482.48 h50 r180
T2: Top Overlay "1" at 4551.26,7482.48 h50 r180; Top Overlay "2" at 4361.26,7482.48 h50 r180; Top Overlay "3" at 4161.26,7482.48 h50 r180
T3: Top Overlay "1" at 5851.26,7482.48 h50 r180; Top Overlay "2" at 5661.26,7482.48 h50 r180; Top Overlay "3" at 5461.26,7482.48 h50 r180
T4: Top Overlay "1" at 7151.26,7482.48 h50 r180; Top Overlay "2" at 6961.26,7482.48 h50 r180; Top Overlay "3" at 6761.26,7482.48 h50 r180
T5: Top Overlay "1" at 3298.74,4192.52 h50; Top Overlay "2" at 3488.74,4192.52 h50; Top Overlay "3" at 3688.74,4192.52 h50
T6: Top Overlay "1" at 4590.41,4192.52 h50; Top Overlay "2" at 4780.41,4192.52 h50; Top Overlay "3" at 4980.41,4192.52 h50
T7: Top Overlay "1" at 5882.07,4192.52 h50; Top Overlay "2" at 6072.07,4192.52 h50; Top Overlay "3" at 6272.07,4192.52 h50
T8: Top Overlay "1" at 7173.74,4192.52 h50; Top Overlay "2" at 7363.74,4192.52 h50; Top Overlay "3" at 7563.74,4192.52 h50
T9: Top Overlay "2" at 2688.74,4192.52 h50; Top Overlay "1" at 2498.74,4192.52 h50